# Altium PCB USBHub3.2G1.PcbDoc
Units mm, origin at the board's own origin, x right, y up, seen from the top; angles counter-clockwise.
Board outline 130 x 25 mm, 2 copper layers (Top Layer, Bottom Layer), stack 1.4 mm thick; 73 components, 58 nets, 365 pads, 0 vias.
Unrouted connection lines stored in the file: 221.
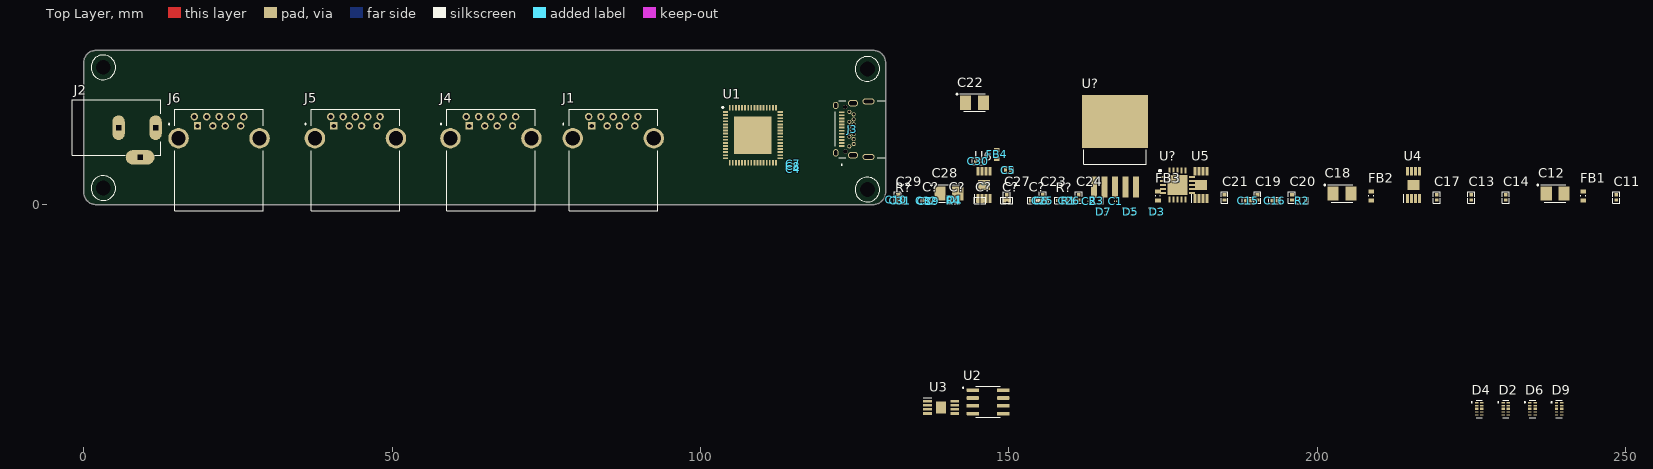
[diagram p0: Top Layer view]
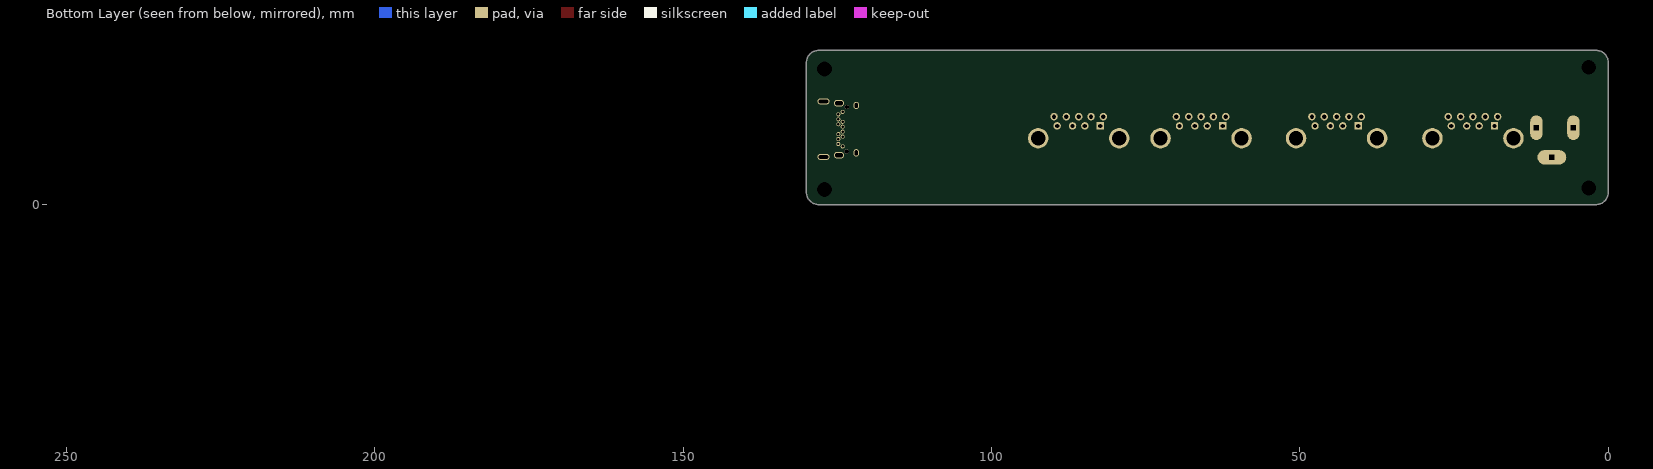
[diagram p1: Bottom Layer view, seen from below]

## Layer stack, top to bottom
Top Solder: solder mask 0.0254, SM-002, Dk 4
Top Layer: signal copper 0.035
Dielectric 1: dielectric 1.33, FR-4, Dk 4.8
Bottom Layer: signal copper 0.035
Bottom Solder: solder mask 0.0254, SM-002, Dk 4

## Board outline
0,2 0,23 cw(c2,23) 2,25 128,25 cw(c128,23) 130,23 130,2 cw(c128,2) 128,0 2,0 cw(c2,2)

## Design rules (kind name [scope] priority, off if disabled: settings)
Clearance [All] p1: gap=0.254 ignorepadtopadclearanceinfootprint=FALSE
PolygonConnect [All] p1: connectstyle=Relief reliefconductorwidth=0.254 reliefentries=4 polygonreliefangle="90 Angle" airgapwidth=0.254
RoutingVias [All] p1: holewidth=0.711 width=1.27 viastyle="Through Hole" minholewidth=0.711 minwidth=1.27 maxholewidth=0.711 maxwidth=1.27
SolderMaskExpansion [All] p1: expansion=0.102 istentingtop=FALSE
SupplyNets "Schematic Supply Nets_3" [InNet('3V3')] p1: voltage=0.000
SupplyNets "Schematic Supply Nets_2" [InNet('1V1')] p2: voltage=0.000
SupplyNets "Schematic Supply Nets_1" [InNet('GND')] p3: voltage=0.000
SupplyNets "Schematic Supply Nets" [InNet('SGND')] p4: voltage=0.000
Width [All] p1: maxlimit=0.254 minlimit=0.254 preferedwidth=0.254
30 further rules are at their usual default settings.

## Classes and differential pairs
component class Schematic: C1 C2 C3 C4 C5 C6 C7 C8 C9 C10 C11 C12 C13 C14 C15 C16 C17 C18 C19 C20 C21 C22 C23 C24 C25 C26 C27 C28 C29 C30 C31 C32 C? D1 D2 D3 D4 D5 D6 D7 D9 FB1 FB2 FB3 FB4 J1 J2 J3 J4 J5 J6 R1 R2 R3 R4 R?

## Components (designator, comment, footprint, x,y, rotation, side; value= is the part's Value field where it differs from the comment)
C1 "CAPNPOL" 0201 167.309,0.521 r0 top value="100 nF"
C2 "CAPNPOL" 0201 162.991,0.521 r0 top value="100 nF"
C3 "CAPNPOL" 0201 136.321,0.521 r0 top value="100 nF"
C4 "CAPNPOL" 0201 114.993,5.715 r0 top value="100 nF"
C5 "CAPNPOL" 0402 149.862,5.587 r0 top value="100 nF"
C6 "CAPNPOL" 0402 155.244,0.648 r0 top value="1 nF"
C7 "CAPNPOL" 0201 115.015,6.642 r180 top value="100 nF"
C8 "CAPNPOL" 0201 115.015,6.183 r180 top value="100 nF"
C9 "CAPNPOL" 0201 137.591,0.521 r0 top value="100 nF"
C10 "CAPNPOL" 0201 131.749,0.775 r90 top value="100 nF"
C11 "CAPNPOL" 0402 248.462,1.156 r90 top value="100 nF"
C12 "CAPPOL" TCJB157M006R0070 238.556,1.791 r0 top value="150 uF"
C13 "CAPNPOL" 0402 224.967,1.156 r90 top value="100 nF"
C14 "CAPNPOL" 0402 230.555,1.156 r90 top value="100 nF"
C15 "CAPNPOL" 0402 188.772,0.648 r0 top value="100 nF"
C16 "CAPNPOL" 0402 193.09,0.648 r0 top value="1 nF"
C17 "CAPNPOL" 0402 219.379,1.156 r90 top value="100 nF"
C18 "CAPPOL" TCJB157M006R0070 204.012,1.791 r0 top value="150 uF"
C19 "CAPNPOL" 0402 190.296,1.156 r90 top value="100 nF"
C20 "CAPNPOL" 0402 195.884,1.156 r90 top value="100 nF"
C21 "CAPNPOL" 0402 184.962,1.156 r90 top value="100 nF"
C22 "CAPPOL" TCJB157M006R0070 144.399,16.51 r0 top value="150 uF"
C23 "CAPNPOL" 0402 155.498,1.156 r90 top value="100 nF"
C24 "CAPNPOL" 0402 161.34,1.156 r90 top value="100 nF"
C25 "CAPNPOL" 0402 155.498,0.648 r0 top value="100 nF"
C26 "CAPNPOL" 0402 159.816,0.648 r0 top value="1 nF"
C27 "CAPNPOL" 0402 149.656,1.156 r90 top value="100 nF"
C28 "CAPPOL" TCJB157M006R0070 140.258,1.791 r0 top value="150 uF"
C29 "CAPNPOL" 0402 132.003,1.156 r90 top value="100 nF"
C30 "CAPNPOL" 0402 145.04,7.01 r0 top value="100 nF"
C31 "CAPNPOL" 0402 132.384,0.648 r0 top value="100 nF"
C32 "CAPNPOL" 0402 136.702,0.648 r0 top value="1 nF"
C? "CAPNPOL" 0402 149.656,0.648 r0 top value="10 uF"
C? "CAPNPOL" 0402 145.338,0.648 r0 top value="10 uF"
C? "CAPNPOL" 0402 141.02,0.648 r0 top value="10 uF"
C? "CAPNPOL" 0402 136.702,0.648 r0 top value="10 uF"
C? "CAPNPOL" 0402 153.974,0.648 r0 top value="10 uF"
D1 "TPD2EUSB30DRTR" DRT_(R-PDSO-N3) 141.274,0.775 r0 top
D2 "ESD204DQAR" DQA0010A 230.555,-33.134 r0 top
D3 "TPD2EUSB30DRTR" DRT_(R-PDSO-N3) 174.04,-1.13 r0 top
D4 "ESD204DQAR" DQA0010A 226.237,-33.134 r0 top
D5 "TPD2EUSB30DRTR" DRT_(R-PDSO-N3) 169.722,-1.13 r0 top
D6 "ESD204DQAR" DQA0010A 234.873,-33.134 r0 top
D7 "TPD2EUSB30DRTR" DRT_(R-PDSO-N3) 165.404,-1.13 r0 top
D9 "ESD204DQAR" DQA0010A 239.191,-33.134 r0 top
FB1 "FerriteBead" FB0603 243.128,1.41 r90 top
FB2 "FerriteBead" FB0603 208.711,1.41 r90 top
FB3 "FerriteBead" FB0603 174.167,1.41 r90 top
FB4 "FerriteBead" FB0603 148.016,8.149 r90 top
J1 "USB1135-15-9-L-B" USB1135-15-9-L-B 85.855,10.748 r0 top
J2 "DC-005" DC-005 9.154,12.459 r0 top
J3 "2338792-1" 2338792-1 129.979,12.218 r90 top
J4 "USB1135-15-9-L-B" USB1135-15-9-L-B 66.017,10.748 r0 top
J5 "USB1135-15-9-L-B" USB1135-15-9-L-B 44.044,10.748 r0 top
J6 "USB1135-15-9-L-B" USB1135-15-9-L-B 21.942,10.748 r0 top
R1 "Resistor" R0402 159.689,0.648 r0 top value="1 MOhm"
R2 "Resistor" R0402 197.535,0.648 r0 top value="1 MOhm"
R3 "Resistor" R0402 164.261,0.648 r0 top value="1 MOhm"
R4 "Resistor" R0402 141.02,0.648 r0 top value="1 MOhm"
R? "Resistor" R0402 132.384,0.648 r0 top value="4.99 kOhms"
R? "Resistor" R0402 158.419,0.648 r0 top value="1.87 kOhms"
U1 "TUSB8042ARGCT" RGC0064G 108.482,11.245 r0 top
U2 "AT24C04D-SSHM-B" SOIC-8 146.608,-31.991 r0 top
U3 "TPS2001CDGN" DGN0008G 138.988,-32.88 r0 top
U4 "TPS2001CDGN" DGN0008G 215.569,3.188 r90 top
U5 "TPS2001CDGN" DGN0008G 181.152,3.188 r90 top
U6 "TPS2001CDGN" DGN0008G 145.973,3.188 r90 top
U? "TPS74801RGWRM3" RGW0020A 177.342,3.188 r0 top
U? "TPS7A4533KTTR" R-PSFM-G5 167.182,13.475 r90 top
? "Furo" FURO_M2 3.177,22.245 r0 top
? "Furo" FURO_M2 3.177,2.672 r0 top
? "Furo" FURO_M2 127.054,2.426 r0 top
? "Furo" FURO_M2 127.054,21.997 r0 top

## Footprints (in the part's own frame and the unit in brackets; to place one, negate y for a bottom-side part, rotate by r counter-clockwise, add the part's x,y. Pads: shape width x height; smd on the part's side, far side on the other; paste and mask are expansions set on the pad)
0201 [mm]
  rect 0.22x0.23 smd mask+0.038: 1(-0.185,0) 2(0.185,0)
  body extent -0.13,-0.06 0.13,0.06, height 0.14
0402 [mm]
  rect 0.54x0.6 smd: 1(-0.43,0) 2(0.43,0)
  silkscreen extent -0.96,-0.55 0.94,0.56, body extent -0.5,-0.25 0.5,0.25, height 0.6
2338792-1 [mm]
  rect 0.3x0.9 smd: A1(-2.75,7.075) A2(-2.25,7.075) A3(-1.75,7.075) A4(-1.25,7.075) A5(-0.75,7.075) A6(-0.25,7.075) A7(0.25,7.075) A8(0.75,7.075) A9(1.25,7.075) A10(1.75,7.075) A11(2.25,7.075) A12(2.75,7.075)
  round 0.65 hole 0.4: B1(2.8,5.855) B2(2.4,5.155) B3(1.6,5.155) B4(1.2,5.855) B5(0.8,5.155) B6(0.4,5.855) B7(-0.4,5.855) B8(-0.8,5.155) B9(-1.2,5.855) B10(-1.6,5.155) B11(-2.4,5.155) B12(-2.8,5.855)
  oval 0.95x1.95 hole 0.55 slot 1.55 at 90 deg: G1(-4.5,2.74) G6(4.5,2.74)
  oval 1.05x1.65 hole 0.65 slot 1.25 at 90 deg: G2(-4.22,5.255) G5(4.22,5.255)
  oval 1.2x0.85 hole 0.45 slot 0.8 at 0 deg: G3(-3.845,8.055) G4(3.845,8.055)
  round 0.68 hole 0.68 unplated: ""(-3.6,6.505) ""(3.6,6.505)
  silkscreen extent -5.85,0 4.62,8.15, body extent -4.62,-0.94 4.62,8.16, height 3.36
DC-005 [mm]
  oval 4.7x2.35 hole 0.8 square: 2(0,-4.8)
  oval 2x4 hole 0.8 square: 3(-3.5,0) 4(2.5,0)
  silkscreen extent -11,-4.5 3.3,4.5, body extent -11.05,-4.9 3.25,4.5, height 11
DGN0008G [mm]
  rect 1.4x0.45 smd: 1(-2.2,0.975) 2(-2.2,0.325) 3(-2.2,-0.325) 4(-2.2,-0.975) 5(2.2,-0.975) 6(2.2,-0.325) 7(2.2,0.325) 8(2.2,0.975)
  rect 1.6x1.92 smd: 9(0,0)
  silkscreen extent -2.9,1.55 -1.5,1.55, body extent -2.45,-1.5 2.45,1.5, height 1.1
DQA0010A [mm]
  rrect5% 0.565x0.2 smd: 1(-0.417,1) 2(-0.417,0.5) 4(-0.417,-0.5) 5(-0.417,-1) 6(0.417,-1) 7(0.417,-0.5) 9(0.417,0.5) 10(0.417,1)
  rrect5% 0.565x0.4 smd paste-1: 3(-0.417,0) 8(0.417,0)
  silkscreen extent -1.32,-1.42 0.5,1.42, body extent -0.5,-1.25 0.5,1.25, height 0.55
DRT_(R-PDSO-N3) [mm]
  rrect25% 0.46x0.2 smd: 1(-0.52,0.35) 2(-0.52,-0.35) 3(0.52,0)
  silkscreen extent -1.35,-0.5 0.4,0.65, body extent -0.5,-0.5 0.5,0.5, height 0.5
FB0603 [mm]
  rect 0.65x0.9 smd: 1(-0.725,0) 2(0.725,0)
  silkscreen extent -0.08,-0.4 0.08,0.4, body extent -0.8,-0.4 0.8,0.4, height 0.81
FURO_M2 [mm]
  round 0 hole 2.4 unplated mask+0: 4(0,0)
  silkscreen extent -2,-2 2,2
R0402 [mm]
  rect 0.475x0.5 smd: 1(-0.512,0) 2(0.512,0)
  silkscreen extent -1.01,-0.51 1.02,0.51, body extent -0.5,-0.25 0.5,0.25, height 0.35
R-PSFM-G5 [mm]
  rect 3.4x1 smd paste-5: 1(-10.6,3.4) 2(-10.6,1.7) 3(-10.6,0) 4(-10.6,-1.7) 5(-10.6,-3.4)
  rect 8.6x10.7 smd paste-5: 6(0,0)
  silkscreen extent -13.3,-5.08 -4.62,5.08, body extent -11.17,-5.08 3.18,5.08, height 4.66
RGC0064G [mm]
  rect 0.85x0.3 smd: 1(-4.45,3.75) 2(-4.45,3.25) 3(-4.45,2.75) 4(-4.45,2.25) 5(-4.45,1.75) 6(-4.45,1.25) 7(-4.45,0.75) 8(-4.45,0.25) 9(-4.45,-0.25) 10(-4.45,-0.75) 11(-4.45,-1.25) 12(-4.45,-1.75) 13(-4.45,-2.25) 14(-4.45,-2.75) 15(-4.45,-3.25) 16(-4.45,-3.75) 33(4.45,-3.75) 34(4.45,-3.25) 35(4.45,-2.75) 36(4.45,-2.25) 37(4.45,-1.75) 38(4.45,-1.25) 39(4.45,-0.75) 40(4.45,-0.25) 41(4.45,0.25) 42(4.45,0.75) 43(4.45,1.25) 44(4.45,1.75) 45(4.45,2.25) 46(4.45,2.75) 47(4.45,3.25) 48(4.45,3.75)
  rect 0.3x0.85 smd: 17(-3.75,-4.45) 18(-3.25,-4.45) 19(-2.75,-4.45) 20(-2.25,-4.45) 21(-1.75,-4.45) 22(-1.25,-4.45) 23(-0.75,-4.45) 24(-0.25,-4.45) 25(0.25,-4.45) 26(0.75,-4.45) 27(1.25,-4.45) 28(1.75,-4.45) 29(2.25,-4.45) 30(2.75,-4.45) 31(3.25,-4.45) 32(3.75,-4.45) 49(3.75,4.45) 50(3.25,4.45) 51(2.75,4.45) 52(2.25,4.45) 53(1.75,4.45) 54(1.25,4.45) 55(0.75,4.45) 56(0.25,4.45) 57(-0.25,4.45) 58(-0.75,4.45) 59(-1.25,4.45) 60(-1.75,4.45) 61(-2.25,4.45) 62(-2.75,4.45) 63(-3.25,4.45) 64(-3.75,4.45)
  rect 6.05x6.05 smd: 65(0,0)
  silkscreen extent -5,4.38 -4.75,4.62, body extent -4.5,-4.5 4.5,4.5, height 1
RGW0020A [mm]
  rect 1x0.35 smd: 1(-2.35,1.3) 2(-2.35,0.65) 3(-2.35,0) 4(-2.35,-0.65) 5(-2.35,-1.3) 11(2.35,-1.3) 12(2.35,-0.65) 13(2.35,0) 14(2.35,0.65) 15(2.35,1.3)
  rect 0.35x1 smd: 6(-1.3,-2.35) 7(-0.65,-2.35) 8(0,-2.35) 9(0.65,-2.35) 10(1.3,-2.35) 16(1.3,2.35) 17(0.65,2.35) 18(0,2.35) 19(-0.65,2.35) 20(-1.3,2.35)
  rect 3.25x3.25 smd: 21(0,0)
  silkscreen extent -3.01,2.11 -2.69,2.44, body extent -2.5,-2.5 2.5,2.5, height 1
SOIC-8 [mm]
  rrect25% 1.97x0.6 smd: 1(-2.47,1.905) 2(-2.47,0.635) 3(-2.47,-0.635) 4(-2.47,-1.905) 5(2.47,-1.905) 6(2.47,-0.635) 7(2.47,0.635) 8(2.47,1.905)
  silkscreen extent -4.14,-2.52 1.95,2.52, body extent -3,-2.45 3,2.45, height 1.75
TCJB157M006R0070 [mm]
  rect 1.8x2.3 smd: 1(-1.45,0) 2(1.45,0)
  silkscreen extent -2.92,-1.43 1.75,1.49, body extent -1.75,-1.43 1.75,1.43, height 2.1
USB1135-15-9-L-B [mm]
  rect 1.208x1.208 hole 0.7: 1(-3.5,2)
  round 1.208 hole 0.7: 2(-1,2) 3(1,2) 4(3.5,2) 5(4,3.5) 6(2,3.5) 7(0,3.5) 8(-2,3.5) 9(-4,3.5)
  round 3.316 hole 2.3: S1(-6.57,0) S2(6.57,0)
  silkscreen extent -8.2,-11.78 7.17,4.72, body extent -7.74,-11.78 7.73,4.72, height 7.58

## Part data
C1 C2 C3 C4 C7 C8 C9 C10: library part GRT033R61C104KE01D, "Multilayer Ceramic Capacitors MLCC - SMD/SMT 0.1 uF 16 VDC 10% 0201 X5R AEC-Q200", Manufacter="Murata Electronics", Package=0201, Supplier Part Number 1=81-GRT033R61C104KE1D, Montagem=SMD, Nome=GRT033R61C104KE01D, Part Number=GRT033R61C104KE01D, Polarizado/Não polarizado="Não polarizado", Sub-Tipo=Ceramico, Supplier 1=Mouser, Supplier 2=Digikey, Supplier 3=LCSC, Supplier Part Number 2=490-GRT033R61C104KE01DCT-ND, Supplier Part Number 3=C6955435
C5 C11 C13 C14 C15 C17 C19 C20 C21 C23 C24 C25 C27 C29 C30 C31: library part GRT155R71C104KE01J, "Multilayer Ceramic Capacitors MLCC - SMD/SMT 0.1 uF 16 VDC 10% 0402 X7R AEC-Q200", Manufacter="Murata Electronics", Package=0402, Supplier Part Number 1=81-GRT155R71C104KE1J, Montagem=SMD, Nome=GRT155R71C104KE01J, Part Number=GRT155R71C104KE01J, Polarizado/Não polarizado="Não polarizado", Sub-Tipo=Ceramico, Supplier 1=Mouser, Supplier 2=Digikey, Supplier 3=LCSC, Supplier Part Number 2=490-GRT155R71C104KE01JCT-ND, Supplier Part Number 3=C3841254
C6 C16 C26 C32: library part GCM155R72A102KA37J, "Multilayer Ceramic Capacitors MLCC - SMD/SMT 1000 pF 100 VDC 10% 0402 X7R AEC-Q200", Manufacter="Murata Electronics", Package=0402, Supplier Part Number 1=81-GCM155R72A102KA7J, Montagem=SMD, Nome=GCM155R72A102KA37J, Part Number=GCM155R72A102KA37J, Polarizado/Não polarizado="Não polarizado", Sub-Tipo=Ceramico, Supplier 1=Mouser, Supplier 2=Digikey, Supplier 3=LCSC, Supplier Part Number 2=490-GRT155R71C104KE01JCT-ND, Supplier Part Number 3=C3841254
C12 C18 C22 C28: library part TCJB157M006R0070, "Tantalum Capacitors - Polymer 6.3V 150uF 20% 1210 ESR=70mOhm", Manufacter="KYOCERA AVX", Supplier Part Number 1=581-TCJB157M006R0070, Montagem=SMD, Nome=TCJB157M006R0070, Package=TCJB157M006R0070, Part Number=TCJB157M006R0070, Polarizado/Não polarizado=Polarizado, Sub-Tipo=Tântalo, Supplier 1=Mouser, Supplier 2=Digikey, Supplier 3=LCSC, Supplier Part Number 2=478-4921-1-ND, Supplier Part Number 3=C24904
C? C? C? C? C?: library part GRM155R61A106ME11D, "Multilayer Ceramic Capacitors MLCC - SMD/SMT 10 uF 10 VDC 20% 0402 X5R", Manufacter="Murata Electronics", Package=0402, Supplier Part Number 1=81-GRM155R61A106ME1D, Montagem=SMD, Nome=GRM155R61A106ME11D, Part Number=GRM155R61A106ME11D, Polarizado/Não polarizado="Não polarizado", Sub-Tipo=Ceramico, Supplier 1=Mouser, Supplier 2=Digikey, Supplier 3=LCSC, Supplier Part Number 2=490-GRM155R61A106ME11DCT-ND, Supplier Part Number 3=C408132
D1 D3 D5 D7: "ESD Protection Diodes / TVS Diodes 2Ch ESD Solution", Breakdown Voltage="7 V", Manufacter="Texas Instruments", Package=DRT_(R-PDSO-N3), Peak Pulse Current="5 A", Peak Pulse Power Dissipation="45 W", Supplier Part Number 1=595-TPD2EUSB30DRTR, Bidirecional/Unidirecional=TPD2EUSB30DRTR, Montagem=SMD, Nome=TPD2EUSB30DRTR, Part Number=TPD2EUSB30DRTR, Supplier 1=Mouser, Supplier 2=Digikey, Supplier 3=LCSC, Supplier Part Number 2=296-25509-1-ND, Supplier Part Number 3=TPD2EUSB30DRTR
D2 D4 D6 D9: "ESD Protection Diodes / TVS Diodes Quad 0.55-pF +/-3.6 -V +/-30-kV ESD pro", Breakdown Voltage="7.9 V", Manufacter="Texas Instruments", Package=DQA0010A, Peak Pulse Current="5.5 A", Peak Pulse Power Dissipation="50 W", Supplier Part Number 1=595-ESD204DQAR, Bidirecional/Unidirecional=ESD204DQAR, Montagem=SMD, Nome=ESD204DQAR, Part Number=ESD204DQAR, Supplier 1=Mouser, Supplier 2=Digikey, Supplier 3=LCSC, Supplier Part Number 2=296-49504-1-ND, Supplier Part Number 3=C553132
FB1 FB2 FB3 FB4: library part BLM18KG221SH1D, "Ferrite Beads 220 OHM Alternate Sizing Guide Below", Manufacter="Murata Electronics", Package=0603, Supplier Part Number 1=81-BLM18KG221SH1D, Tolerancia=25%, Corrente Max="2.2 A", imepdancia="220 Ohms", Nome=BLM18KG221SH1D, Part Number=BLM18KG221SH1D, Supplier 1=Mouser, Supplier 2=Digikey, Supplier 3=LCSC, Supplier Part Number 2=490-13256-1-ND, Supplier Part Number 3=C527991, Tipo="Ferrite Bead"
J1 J4 J5 J6: "USB Connectors USB A 3.0 Skt RA High Life 15u\" T Hole W/Shell Stake Tray", Manufacter=GCT, Supplier Part Number 1=640-USB1135-15-9-L-B, Colunas=0, Montagem=PTH, Nome=USB1135-15-9-L-B, Part Number=USB1135-15-9-L-B, Pinos por coluna=0, Sub-Tipo=USB, Supplier 1=Mouser, Supplier 2=Digikey, Supplier 3=LCSC, Supplier Part Number 2=2073-USB1135-15-9-L-B-ND, Supplier Part Number 3=C5456888, Total de Pinos=11
J2: "DC Jack", Manufacter=Generic, Colunas=0, Montagem=PTH, Nome=DC-005, Part Number=DC-005, Pinos por coluna=3, Sub-Tipo="DC Jack", Total de Pinos=3
J3: "USB Connectors USB TYPE C 3.1 CONN REV TOP MOUNT CH1.6", Manufacter="TE Connectivity", Supplier Part Number 1=571-2338792-1, Colunas=0, Montagem=PTH/SMD, Nome=2338792-1, Part Number=2338792-1, Pinos por coluna=0, Sub-Tipo=USB, Supplier 1=Mouser, Supplier 2=Digikey, Supplier 3=LCSC, Supplier Part Number 2=17-2338792-1CT-ND, Supplier Part Number 3=C6077276, Total de Pinos=24
R1 R2 R3 R4: library part CRCW04021M00FKEE, "Thick Film Resistors 1M OHM 1%", Manufacter=Vishay, Package=0402, Supplier Part Number 1=71-CRCW04021M00FKEE, Tolerancia=1%, Montagem=SMD, Nome=CRCW04021M00FKEE, Part Number=CRCW04021M00FKEE, Potencia="62.5 mW", Simbolo=Resistor, Supplier 1=Mouser, Supplier 2=Digikey, Supplier 3=LCSC, Supplier Part Number 2=541-CRCW04021M00FKEECT-ND, Supplier Part Number 3=C4207375
R?: library part RT0402BRD074K99L, "Thin Film Resistors 1/16W 4.99K ohm .1% 25ppm", Manufacter=YAGEO, Package=0402, Supplier Part Number 1=603-RT0402BRD074K99L, Tolerancia=1%, Montagem=SMD, Nome=RT0402BRD074K99L, Part Number=RT0402BRD074K99L, Potencia="62.5 mW", Simbolo=Resistor, Supplier 1=Mouser, Supplier 2=Digikey, Supplier 3=LCSC, Supplier Part Number 2=YAG1447CT-ND, Supplier Part Number 3=C852823
R?: library part AC0402FR-071K87L, "Thick Film Resistors 1.87 kOhms 1/16 W 50 V 1% 0402 100 PPM / C - 55 C + 155 C AEC-Q200", Manufacter=YAGEO, Package=0402, Supplier Part Number 1=603-AC0402FR-071K87L, Tolerancia=1%, Montagem=SMD, Nome=AC0402FR-071K87L, Part Number=AC0402FR-071K87L, Potencia="62.5 mW", Simbolo=Resistor, Supplier 1=Mouser, Supplier 2=Digikey, Supplier 3=LCSC, Supplier Part Number 2=YAG5270CT-ND, Supplier Part Number 3=C705744
U1: "USB Interface IC Four-port USB 3.2 x1 gen1 hub 64-VQFN 0 A 595-TUSB8042ARGCR", Manufacter="Texas Instruments", Package=RGC0064G, Supplier Part Number 1=595-TUSB8042ARGCT, Montagem=SMD, Nome=TUSB8042ARGCT, Part Number=TUSB8042ARGCT, Sub-Tipo="USB HUB", Supplier 1=Mouser, Supplier 2=Digikey, Supplier 3=LCSC, Supplier Part Number 2=296-TUSB8042ARGCT-ND, Supplier Part Number 3=C2678051
U2: "EEPROM 1.7-3.6V, 1MHz, Ind Tmp, 8-SOIC-N", Manufacter="Microchip Technology", Package=SOIC-8, Supplier Part Number 1=556-AT24C04D-SSHM-B, Montagem=SMD, Nome=AT24C04D-SSHM-B, Part Number=AT24C04D-SSHM-B, Sub-Tipo=Memoria, Supplier 1=Mouser, Supplier 2=Digikey, Supplier 3=LCSC, Supplier Part Number 2=AT24C04D-SSHM-B-ND, Supplier Part Number 3=C1349373
U3 U4 U5 U6: "Power Switch ICs - Power Distribution SGL CH CURRENT-LTD U SB PWR DISTR SWITCH A 595-TPS2001CDGNR", Manufacter="Texas Instruments", Package=DGN0008G, Supplier Part Number 1=595-TPS2001CDGN, Montagem=SMD, Nome=TPS2001CDGN, Part Number=TPS2001CDGN, Sub-Tipo="Conversor DC/DC", Supplier 1=Mouser, Supplier 2=Digikey, Supplier 3=LCSC, Supplier Part Number 2=296-29336-5-ND, Supplier Part Number 3=C206204
U?: "Linear Voltage Regulators 1.5-A low-VIN (0.8 V ) adjustable low-dro", Manufacter="Texas Instruments", Package=RGW0020A, Supplier Part Number 1=595-TPS74801RGWRM3, Montagem=SMD, Nome=TPS74801RGWRM3, Part Number=TPS74801RGWRM3, Sub-Tipo="Regulador LDO", Supplier 1=Mouser, Supplier 2=Digikey, Supplier Part Number 2=296-TPS74801RGWRM3CT-ND
U?: "LDO Voltage Regulators Low-Noise Fast Trans -Resp 1.5A", Manufacter="Texas Instruments", Package=R-PSFM-G5, Supplier Part Number 1=595-TPS7A4533KTTR, Montagem=SMD, Nome=TPS7A4533KTTR, Part Number=TPS7A4533KTTR, Sub-Tipo="Regulador LDO", Supplier 1=Mouser, Supplier 2=Digikey, Supplier 3=LCSC, Supplier Part Number 2=296-23755-1-ND, Supplier Part Number 3=C2865625
? ? ? ?: library part FURO_M2, "Furo para parafuso M2", Nome=FURO_M2, Part Number=FURO_M2, Sub-Tipo=Furo

## Nets (pads, with @x,y where several pads share a name; then routed paths per layer and width w, separated by ;. In a path a pad name is that pad's centre, name@x,y a point inside that pad or via, vN(x,y) a via of type N, cw(c..) or ccw(c..) an arc to the next point about the centre after c; other vN are vias at no path point)
1V1: C?.1@136.272,0.648 R?.2@158.931,0.648 U?.1@174.992,4.488 U?.18 U?.19 U?.20
3V3: C?.1@140.59,0.648 C?.1@144.908,0.648 U?.4@168.882,2.875 U?.5 U?.6@176.042,0.838 U?.7 U?.8 U?.10 U?.11
GND: C5.2 C6.2 C11.2 C12.2 C13.2 C14.2 C15.2 C16.2 C17.2 C18.2 C19.2 C20.2 C21.2 C22.2 C23.2 C24.2 C25.2 C26.2 C27.2 C28.2 C29.2 C30.2 C31.2 C32.2 C?.2 D1.3 D2.3 D2.8 D3.3 D4.3 D4.8 D5.3 D6.3 D6.8 D7.3 D9.3 D9.8 J1.4 J1.7 J2.2 J2.3 J4.4 J4.7 J5.4 J5.7 J6.4 J6.7 R1.1 R2.1 R3.1 R4.1 R?.1@131.872,0.648 U1.65 U3.1 U3.9 U4.1 U4.9 U5.1 U5.9 U6.1 U6.9 U?.2@174.992,3.838 U?.3 U?.4@174.992,2.538 U?.6@167.182,13.475 U?.12 U?.13 U?.14 U?.17 U?.21
NetC1_1: C1.1 D2.2 D2.9 U1.4
NetC1_2: C1.2 J1.8
NetC2_1: C2.1 D2.1 D2.10 U1.3
NetC2_2: C2.2 J1.9
NetC3_1: C3.1 D4.2 D4.9 U1.12
NetC3_2: C3.2 J4.8
NetC4_1: C4.1 D4.1 D4.10 U1.11
NetC4_2: C4.2 J4.9
NetC7_1: C7.1 D6.2 D6.9 U1.20
NetC7_2: C7.2 J5.8
NetC8_1: C8.1 D6.1 D6.10 U1.19
NetC8_2: C8.2 J5.9
NetC9_1: C9.1 D9.2 D9.9 U1.27
NetC9_2: C9.2 J6.8
NetC10_1: C10.1 D9.1 D9.10 U1.26
NetC10_2: C10.2 J6.9
NetC11_1: C11.1 U3.2 U3.3
NetC12_1: C12.1 C13.1 FB1.1 U3.6 U3.7 U3.8
NetC14_1: C14.1 FB1.2 J1.1
NetC17_1: C17.1 U4.2 U4.3
NetC18_1: C18.1 C19.1 FB2.1 U4.6 U4.7 U4.8
NetC20_1: C20.1 FB2.2 J4.1
NetC21_1: C21.1 U5.2 U5.3
NetC22_1: C22.1 C23.1 FB3.1 U5.6 U5.7 U5.8
NetC24_1: C24.1 FB3.2 J5.1
NetC27_1: C27.1 U6.2 U6.3
NetC28_1: C28.1 C29.1 FB4.1 U6.6 U6.7 U6.8
NetC30_1: C30.1 FB4.2 J6.1
NetC?_1: C?.1@149.226,0.648 C?.1@153.544,0.648 J2.4 U?.1@163.782,2.875 U?.2@165.482,2.875
NetD1_1: D1.1 J1.3 U1.1
NetD1_2: D1.2 J1.2 U1.2
NetD2_4: D2.4 D2.7 J1.6 U1.6
NetD2_5: D2.5 D2.6 J1.5 U1.7
NetD3_1: D3.1 J4.3 U1.9
NetD3_2: D3.2 J4.2 U1.10
NetD4_4: D4.4 D4.7 J4.6 U1.14
NetD4_5: D4.5 D4.6 J4.5 U1.15
NetD5_1: D5.1 J5.3 U1.17
NetD5_2: D5.2 J5.2 U1.18
NetD6_4: D6.4 D6.7 J5.6 U1.22
NetD6_5: D6.5 D6.6 J5.5 U1.23
NetD7_1: D7.1 J6.3 U1.24
NetD7_2: D7.2 J6.2 U1.25
NetD9_4: D9.4 D9.7 J6.6 U1.29
NetD9_5: D9.5 D9.6 J6.5 U1.30
NetR?_1: R?.1@157.907,0.648 R?.2@132.896,0.648 U?.16
NetU1_32: U1.32 U6.4
NetU1_33: U1.33 U5.4
NetU1_35: U1.35 U4.4
NetU1_36: U1.36 U3.4
NetU1_43: U1.43 U6.5
NetU1_44: U1.44 U5.5
NetU1_46: U1.46 U3.5
NetU1_47: U1.47 U4.5
SGND: C5.1 C6.1 C15.1 C16.1 C25.1 C26.1 C31.1 C32.1 J1.S1 J1.S2 J4.S1 J4.S2 J5.S1 J5.S2 J6.S1 J6.S2 R1.2 R2.2 R3.2 R4.2
pads on no net: ?.4 J3. J3.A1 J3.A2 J3.A3 J3.A4 J3.A5 J3.A6 J3.A7 J3.A8 J3.A9 J3.A10 J3.A11 J3.A12 J3.B1 J3.B2 J3.B3 J3.B4 J3.B5 J3.B6 J3.B7 J3.B8 J3.B9 J3.B10 J3.B11 J3.B12 J3.G1 J3.G2 J3.G3 J3.G4 J3.G5 J3.G6 U1.5 U1.8 U1.13 U1.16 U1.21 U1.28 U1.31 U1.34 U1.37 U1.38 U1.39 U1.40 U1.41 U1.42 U1.45 U1.48 U1.49 U1.50 U1.51 U1.52 U1.53 U1.54 U1.55 U1.56 U1.57 U1.58 U1.59 U1.60 U1.61 U1.62 U1.63 U1.64 U2.1 U2.2 U2.3 U2.4 U2.5 U2.6 U2.7 U2.8 U?.9 U?.15

## Silkscreen, mask and mechanical layers (free items; w line width, h text height)
BoardShape:
  the board outline again, w0.254

## Text inside footprints (layer, text, board x,y; h text height)
J3: Mechanical 13 "PCB EDGE" at 129.774,17.618 h1.52 r90